# Altium PCB AICat V1.7 双面板 板厚1.6mm_lrd.PcbDoc (part 2 of 6)
Units mm, origin at the board's own origin, x right, y up, seen from the top; angles counter-clockwise.
Board outline 63.83 x 43.59 mm, 2 copper layers (Top Layer, Bottom Layer); 123 components, 84 nets, 332 pads, 255 vias.
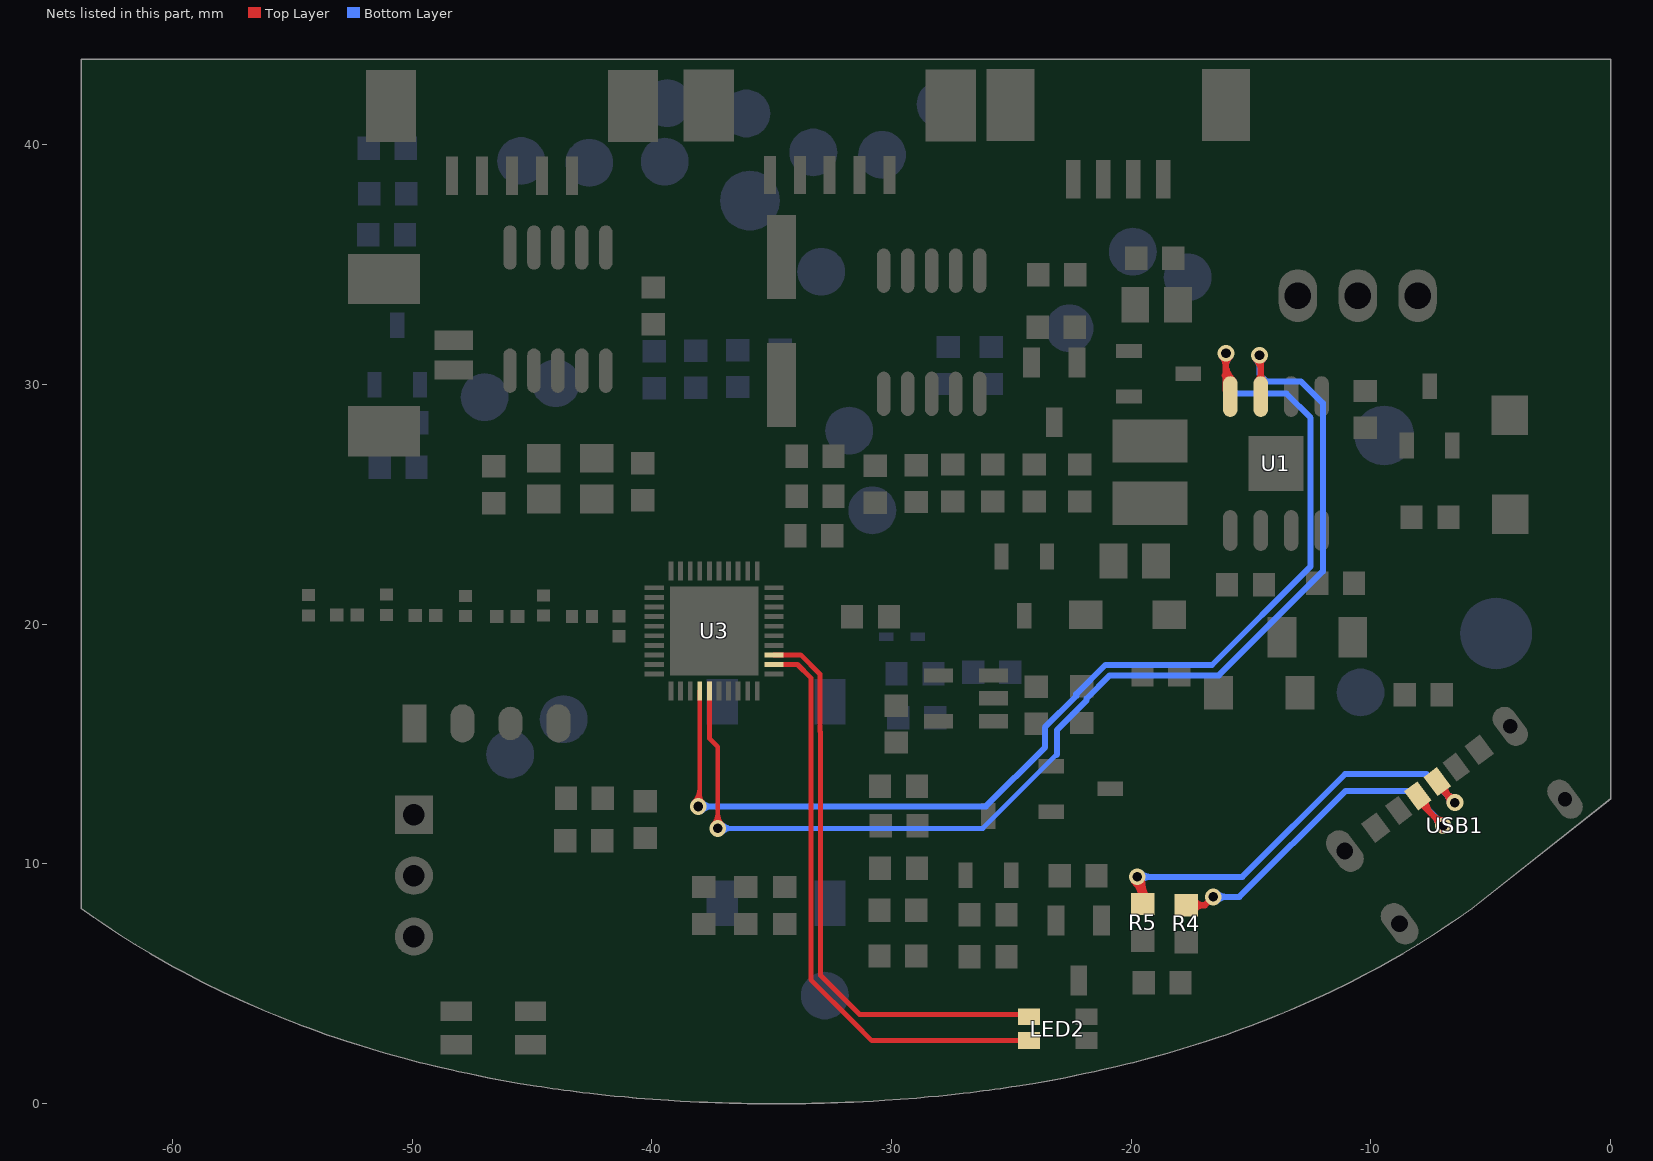
[diagram p2: the nets of this part, all layers, seen from the top]

## Via types
v1: diameter 0.7, hole 0.4, Top Layer to Bottom Layer, tented both sides, 255 vias

## Nets (pads, with @x,y where several pads share a name; then routed paths per layer and width w, separated by ;. In a path a pad name is that pad's centre, name@x,y a point inside that pad or via, vN(x,y) a via of type N, cw(c..) or ccw(c..) an arc to the next point about the centre after c; other vN are vias at no path point) (continued)
CC1: R4.1 USB1.A5 | length 36.8
  Top Layer w0.254: R4.1@-17.697,8.269 -16.927,8.269 ; v1(-16.579,8.616) -16.927,8.269 ; USB1.A5@-8.038,12.83 -8.038,12.648 v1(-6.978,11.588) ; R4.1@-17.417,8.046 cw(c-16.927,7.617) -16.927,8.269 ; R4.1@-17.417,8.046 cw(c-16.927,7.617) -16.927,8.269 ; R4.1@-17.417,8.046 cw(c-16.927,7.617) -16.927,8.269 ; R4.1@-17.417,8.046 cw(c-16.927,7.617) -16.927,8.269 ; R4.1@-17.417,8.046 cw(c-16.927,7.617) -16.927,8.269 ; R4.1@-17.417,8.491 ccw(c-16.927,8.92) -16.927,8.269 ; R4.1@-17.417,8.491 ccw(c-16.927,8.92) -16.927,8.269 ; R4.1@-17.417,8.491 ccw(c-16.927,8.92) -16.927,8.269 ; R4.1@-17.417,8.491 ccw(c-16.927,8.92) -16.927,8.269 ; R4.1@-17.417,8.491 ccw(c-16.927,8.92) -16.927,8.269 ; USB1.A5@-7.725,12.71 ccw(c-6.819,12.71) -7.46,12.07 ; USB1.A5@-7.725,12.71 ccw(c-6.819,12.71) -7.46,12.07 ; USB1.A5@-7.725,12.71 ccw(c-6.819,12.71) -7.46,12.07 ; USB1.A5@-7.725,12.71 ccw(c-6.819,12.71) -7.46,12.07 ; USB1.A5@-7.725,12.71 ccw(c-6.819,12.71) -7.46,12.07 ; -7.359,11.969 cw(c-7.739,11.588) v1@-7.201,11.588 ; -7.359,11.969 ccw(c-6.978,12.349) v1@-6.978,11.811 ; -7.359,11.969 cw(c-7.739,11.588) v1@-7.201,11.588 ; -7.359,11.969 ccw(c-6.978,12.349) v1@-6.978,11.811 ; -7.359,11.969 ccw(c-6.978,12.349) v1@-6.978,11.811 ; -7.359,11.969 cw(c-7.739,11.588) v1@-7.201,11.588 ; -7.359,11.969 ccw(c-6.978,12.349) v1@-6.978,11.811 ; -7.359,11.969 cw(c-7.739,11.588) v1@-7.201,11.588 ; -7.359,11.969 ccw(c-6.978,12.349) v1@-6.978,11.811 ; -7.359,11.969 cw(c-7.739,11.588) v1@-7.201,11.588
  Bottom Layer w0.254: v1(-16.579,8.616) -15.487,8.616 -11.067,13.036 -8.4,13.036 v1@-6.965,11.601 ; v1@-16.421,8.458 cw(c-16.041,8.078) -16.041,8.616 ; v1@-16.421,8.458 cw(c-16.041,8.078) -16.041,8.616 ; v1@-16.421,8.458 cw(c-16.041,8.078) -16.041,8.616 ; v1@-16.421,8.458 cw(c-16.041,8.078) -16.041,8.616 ; v1@-16.421,8.458 cw(c-16.041,8.078) -16.041,8.616 ; v1@-16.421,8.774 ccw(c-16.041,9.155) -16.041,8.616 ; v1@-16.421,8.774 ccw(c-16.041,9.155) -16.041,8.616 ; v1@-16.421,8.774 ccw(c-16.041,9.155) -16.041,8.616 ; v1@-16.421,8.774 ccw(c-16.041,9.155) -16.041,8.616 ; v1@-16.421,8.774 ccw(c-16.041,9.155) -16.041,8.616 ; -7.376,12.012 cw(c-7.801,11.588) v1@-7.201,11.588 ; -7.376,12.012 cw(c-7.801,11.588) v1@-7.201,11.588 ; -7.376,12.012 cw(c-7.801,11.588) v1@-7.201,11.588 ; -7.376,12.012 cw(c-7.801,11.588) v1@-7.201,11.588 ; -7.376,12.012 cw(c-7.801,11.588) v1@-7.201,11.588 ; -7.315,11.951 ccw(c-6.978,12.288) v1@-6.978,11.811 ; -7.315,11.951 ccw(c-6.978,12.288) v1@-6.978,11.811 ; -7.315,11.951 ccw(c-6.978,12.288) v1@-6.978,11.811 ; -7.315,11.951 ccw(c-6.978,12.288) v1@-6.978,11.811 ; -7.315,11.951 ccw(c-6.978,12.288) v1@-6.978,11.811
CC2: R5.1 USB1.B5 | length 49.2
  Top Layer w0.254: v1(-19.754,9.454) -19.525,9.226 R5.1@-19.525,8.319 ; USB1.B5@-7.239,13.432 -7.239,13.297 v1(-6.495,12.553) ; v1@-19.912,9.297 cw(c-20.844,8.364) R5.1@-19.525,8.364 ; v1@-19.912,9.297 cw(c-20.844,8.364) R5.1@-19.525,8.364 ; v1@-19.912,9.297 cw(c-20.844,8.364) R5.1@-19.525,8.364 ; v1@-19.912,9.297 cw(c-20.844,8.364) R5.1@-19.525,8.364 ; v1@-19.912,9.297 cw(c-20.844,8.364) R5.1@-19.525,8.364 ; R5.1@-19.764,8.558 ccw(c-20.341,9.135) -19.525,9.135 ; R5.1@-19.764,8.558 ccw(c-20.341,9.135) -19.525,9.135 ; R5.1@-19.764,8.558 ccw(c-20.341,9.135) -19.525,9.135 ; R5.1@-19.764,8.558 ccw(c-20.341,9.135) -19.525,9.135 ; R5.1@-19.764,8.558 ccw(c-20.341,9.135) -19.525,9.135 ; v1@-19.732,9.476 cw(c-20.231,8.977) -19.525,8.977 ; v1@-19.732,9.476 cw(c-20.231,8.977) -19.525,8.977 ; v1@-19.732,9.476 cw(c-20.231,8.977) -19.525,8.977 ; v1@-19.732,9.476 cw(c-20.231,8.977) -19.525,8.977 ; v1@-19.732,9.476 cw(c-20.231,8.977) -19.525,8.977 ; -19.525,9.135 ccw(c-18.709,9.135) R5.1@-19.286,8.558 ; -19.525,9.135 ccw(c-18.709,9.135) R5.1@-19.286,8.558 ; -19.525,9.135 ccw(c-18.709,9.135) R5.1@-19.286,8.558 ; -19.525,9.135 ccw(c-18.709,9.135) R5.1@-19.286,8.558 ; -19.525,9.135 ccw(c-18.709,9.135) R5.1@-19.286,8.558 ; USB1.B5@-7.149,13.089 cw(c-7.149,12.803) -6.947,13.005 ; USB1.B5@-7.149,13.089 cw(c-7.149,12.803) -6.947,13.005 ; USB1.B5@-7.149,13.089 cw(c-7.149,12.803) -6.947,13.005 ; USB1.B5@-7.149,13.089 cw(c-7.149,12.803) -6.947,13.005 ; USB1.B5@-7.149,13.089 cw(c-7.149,12.803) -6.947,13.005 ; USB1.B5@-6.926,13.312 ccw(c-6.135,13.312) v1@-6.694,12.752 ; USB1.B5@-6.926,13.312 ccw(c-6.135,13.312) v1@-6.694,12.752 ; USB1.B5@-6.926,13.312 ccw(c-6.135,13.312) v1@-6.694,12.752 ; USB1.B5@-6.926,13.312 ccw(c-6.135,13.312) v1@-6.694,12.752 ; USB1.B5@-6.926,13.312 ccw(c-6.135,13.312) v1@-6.694,12.752 ; -6.876,12.934 cw(c-7.257,12.553) v1@-6.718,12.553 ; -6.876,12.934 ccw(c-6.495,13.315) v1@-6.495,12.776 ; -6.876,12.934 cw(c-7.257,12.553) v1@-6.718,12.553 ; -6.876,12.934 ccw(c-6.495,13.315) v1@-6.495,12.776 ; -6.876,12.934 ccw(c-6.495,13.315) v1@-6.495,12.776 ; -6.876,12.934 cw(c-7.257,12.553) v1@-6.718,12.553 ; -6.876,12.934 ccw(c-6.495,13.315) v1@-6.495,12.776 ; -6.876,12.934 cw(c-7.257,12.553) v1@-6.718,12.553 ; -6.876,12.934 ccw(c-6.495,13.315) v1@-6.495,12.776 ; -6.876,12.934 cw(c-7.257,12.553) v1@-6.718,12.553
  Bottom Layer w0.254: v1(-19.754,9.454) -15.367,9.454 -11.074,13.747 -7.689,13.747 v1(-6.495,12.553) ; v1@-19.596,9.297 cw(c-19.216,8.916) -19.216,9.454 ; v1@-19.596,9.297 cw(c-19.216,8.916) -19.216,9.454 ; v1@-19.596,9.297 cw(c-19.216,8.916) -19.216,9.454 ; v1@-19.596,9.297 cw(c-19.216,8.916) -19.216,9.454 ; v1@-19.596,9.297 cw(c-19.216,8.916) -19.216,9.454 ; v1@-19.596,9.612 ccw(c-19.216,9.993) -19.216,9.454 ; v1@-19.596,9.612 ccw(c-19.216,9.993) -19.216,9.454 ; v1@-19.596,9.612 ccw(c-19.216,9.993) -19.216,9.454 ; v1@-19.596,9.612 ccw(c-19.216,9.993) -19.216,9.454 ; v1@-19.596,9.612 ccw(c-19.216,9.993) -19.216,9.454 ; -6.876,12.934 cw(c-7.257,12.553) v1@-6.718,12.553 ; -6.876,12.934 ccw(c-6.495,13.315) v1@-6.495,12.776 ; -6.876,12.934 cw(c-7.257,12.553) v1@-6.718,12.553 ; -6.876,12.934 ccw(c-6.495,13.315) v1@-6.495,12.776 ; -6.876,12.934 ccw(c-6.495,13.315) v1@-6.495,12.776 ; -6.876,12.934 cw(c-7.257,12.553) v1@-6.718,12.553 ; -6.876,12.934 ccw(c-6.495,13.315) v1@-6.495,12.776 ; -6.876,12.934 cw(c-7.257,12.553) v1@-6.718,12.553 ; -6.876,12.934 ccw(c-6.495,13.315) v1@-6.495,12.776 ; -6.876,12.934 cw(c-7.257,12.553) v1@-6.718,12.553
CHAR_G: LED2.3 U3.12 | length 24.8
  Top Layer w0.203: U3.12@-34.904,18.314 -33.927,18.314 -33.368,17.755 -33.368,5.162 -31.565,3.358 ; -31.379,3.173 -31.565,3.358 ; LED2.3@-24.268,2.622 -30.828,2.622 -31.565,3.358
CHARG_EN: U1.8 U3.4 | length 73
  Top Layer w0.203: v1(-38.067,12.391) -38.003,12.456 -38.003,14.407 ; -38.003,13.456 -38.003,14.407 ; U3.4@-38.003,17.214 -38.003,14.407 ; v1@-38.243,12.567 ccw(c-38.822,13.146) -38.003,13.146 ; v1@-38.243,12.567 ccw(c-38.822,13.146) -38.003,13.146 ; v1@-38.243,12.567 ccw(c-38.822,13.146) -38.003,13.146 ; v1@-38.243,12.567 ccw(c-38.822,13.146) -38.003,13.146 ; -38.003,12.836 ccw(c-37.623,12.836) v1@-37.892,12.567 ; -38.003,12.836 ccw(c-37.623,12.836) v1@-37.892,12.567 ; -38.003,12.836 ccw(c-37.623,12.836) v1@-37.892,12.567 ; -38.003,12.836 ccw(c-37.623,12.836) v1@-37.892,12.567
  Top Layer w0.254: U1.8@-16.071,29.749 v1@-16.071,31.171 ; -16.071,30.333 -15.868,30.13 U1.8@-15.868,30.079 ; v1@-16.203,31.141 cw(c-16.523,30.821) -16.071,30.821 ; v1@-16.203,31.141 cw(c-16.523,30.821) -16.071,30.821 ; v1@-16.203,31.141 cw(c-16.523,30.821) -16.071,30.821 ; v1@-16.203,31.141 cw(c-16.523,30.821) -16.071,30.821 ; v1@-16.203,31.141 cw(c-16.523,30.821) -16.071,30.821 ; -16.116,30.378 cw(c-16.327,30.167) U1.8@-16.039,30.087 ; -16.116,30.378 cw(c-16.327,30.167) U1.8@-16.039,30.087 ; -16.116,30.378 cw(c-16.327,30.167) U1.8@-16.039,30.087 ; -16.116,30.378 cw(c-16.327,30.167) U1.8@-16.039,30.087 ; -16.116,30.378 cw(c-16.327,30.167) U1.8@-16.039,30.087 ; -16.071,30.347 ccw(c-15.561,30.347) U1.8@-15.922,29.986 ; -16.071,30.347 ccw(c-15.561,30.347) U1.8@-15.922,29.986 ; -16.071,30.347 ccw(c-15.561,30.347) U1.8@-15.922,29.986 ; -16.071,30.347 ccw(c-15.561,30.347) U1.8@-15.922,29.986 ; -16.071,30.347 ccw(c-15.561,30.347) U1.8@-15.922,29.986 ; -16.071,30.699 cw(c-15.446,30.699) v1@-15.888,31.141 ; -16.071,30.699 cw(c-15.446,30.699) v1@-15.888,31.141 ; -16.071,30.699 cw(c-15.446,30.699) v1@-15.888,31.141 ; -16.071,30.699 cw(c-15.446,30.699) v1@-15.888,31.141 ; -16.071,30.699 cw(c-15.446,30.699) v1@-15.888,31.141 ; v1@-16.071,30.96 ccw(c-14.948,30.96) U1.8@-15.742,30.166 ; v1@-16.071,30.96 ccw(c-14.948,30.96) U1.8@-15.742,30.166 ; v1@-16.071,30.96 ccw(c-14.948,30.96) U1.8@-15.742,30.166 ; v1@-16.071,30.96 ccw(c-14.948,30.96) U1.8@-15.742,30.166 ; v1@-16.071,30.96 ccw(c-14.948,30.96) U1.8@-15.742,30.166
  Bottom Layer w0.254: v1(-38.067,12.391) -26.063,12.391 -23.605,14.849 -23.605,15.69 -22.294,17 -22.294,17.076 -21.077,18.294 -16.63,18.294 -12.515,22.408 -12.515,28.606 -13.531,29.622 -15.588,29.622 -16.046,30.079 v1(-16.046,31.298) ; v1@-37.91,12.234 cw(c-37.529,11.853) -37.529,12.391 ; v1@-37.91,12.234 cw(c-37.529,11.853) -37.529,12.391 ; v1@-37.91,12.234 cw(c-37.529,11.853) -37.529,12.391 ; v1@-37.91,12.234 cw(c-37.529,11.853) -37.529,12.391 ; v1@-37.91,12.549 ccw(c-37.529,12.93) -37.529,12.391 ; v1@-37.91,12.549 ccw(c-37.529,12.93) -37.529,12.391 ; v1@-37.91,12.549 ccw(c-37.529,12.93) -37.529,12.391 ; v1@-37.91,12.549 ccw(c-37.529,12.93) -37.529,12.391 ; v1@-16.203,31.141 cw(c-16.584,30.76) -16.046,30.76 ; v1@-16.203,31.141 cw(c-16.584,30.76) -16.046,30.76 ; v1@-16.203,31.141 cw(c-16.584,30.76) -16.046,30.76 ; v1@-16.203,31.141 cw(c-16.584,30.76) -16.046,30.76 ; v1@-16.203,31.141 cw(c-16.584,30.76) -16.046,30.76 ; -16.046,30.76 cw(c-15.507,30.76) v1@-15.888,31.141 ; -16.046,30.76 cw(c-15.507,30.76) v1@-15.888,31.141 ; -16.046,30.76 cw(c-15.507,30.76) v1@-15.888,31.141 ; -16.046,30.76 cw(c-15.507,30.76) v1@-15.888,31.141 ; -16.046,30.76 cw(c-15.507,30.76) v1@-15.888,31.141
CHRG_R: LED2.1 U3.13 | length 24.2
  Top Layer w0.203: U3.13@-34.904,18.714 -33.789,18.714 -32.987,17.913 -32.987,15.525 ; -32.962,15.5 -32.962,5.34 -31.334,3.712 -24.358,3.712 LED2.1@-24.268,3.622
CHRG_STATE: U1.7 U3.5 | length 68.1
  Top Layer w0.203: U3.5@-37.603,17.214 -37.603,15.233 -37.255,14.885 v1(-37.255,11.477) ; v1@-37.43,11.653 ccw(c-37.854,12.077) -37.255,12.077 ; v1@-37.43,11.653 ccw(c-37.854,12.077) -37.255,12.077 ; v1@-37.43,11.653 ccw(c-37.854,12.077) -37.255,12.077 ; v1@-37.43,11.653 ccw(c-37.854,12.077) -37.255,12.077 ; -37.255,12.077 ccw(c-36.655,12.077) v1@-37.079,11.653 ; -37.255,12.077 ccw(c-36.655,12.077) v1@-37.079,11.653 ; -37.255,12.077 ccw(c-36.655,12.077) v1@-37.079,11.653 ; -37.255,12.077 ccw(c-36.655,12.077) v1@-37.079,11.653
  Top Layer w0.254: U1.7@-14.598,29.495 -14.598,30.968 v1@-14.572,30.994 ; v1@-14.806,31.064 cw(c-15.31,30.561) -14.598,30.561 ; v1@-14.806,31.064 cw(c-15.31,30.561) -14.598,30.561 ; v1@-14.806,31.064 cw(c-15.31,30.561) -14.598,30.561 ; v1@-14.806,31.064 cw(c-15.31,30.561) -14.598,30.561 ; v1@-14.806,31.064 cw(c-15.31,30.561) -14.598,30.561 ; U1.7@-14.724,30.166 ccw(c-15.027,30.469) -14.598,30.469 ; U1.7@-14.724,30.166 ccw(c-15.027,30.469) -14.598,30.469 ; U1.7@-14.724,30.166 ccw(c-15.027,30.469) -14.598,30.469 ; U1.7@-14.724,30.166 ccw(c-15.027,30.469) -14.598,30.469 ; U1.7@-14.724,30.166 ccw(c-15.027,30.469) -14.598,30.469 ; -14.598,30.469 ccw(c-14.169,30.469) U1.7@-14.472,30.166 ; -14.598,30.469 ccw(c-14.169,30.469) U1.7@-14.472,30.166 ; -14.598,30.469 ccw(c-14.169,30.469) U1.7@-14.472,30.166 ; -14.598,30.469 ccw(c-14.169,30.469) U1.7@-14.472,30.166 ; -14.598,30.469 ccw(c-14.169,30.469) U1.7@-14.472,30.166 ; -14.598,30.806 cw(c-14.233,30.806) v1@-14.491,31.064 ; -14.598,30.806 cw(c-14.233,30.806) v1@-14.491,31.064 ; -14.598,30.806 cw(c-14.233,30.806) v1@-14.491,31.064 ; -14.598,30.806 cw(c-14.233,30.806) v1@-14.491,31.064 ; -14.598,30.806 cw(c-14.233,30.806) v1@-14.491,31.064
  Bottom Layer w0.203: v1(-37.255,11.477) -26.19,11.477 -23.122,14.545 ; v1@-37.079,11.301 cw(c-36.655,10.877) -36.655,11.477 ; v1@-37.079,11.301 cw(c-36.655,10.877) -36.655,11.477 ; v1@-37.079,11.301 cw(c-36.655,10.877) -36.655,11.477 ; v1@-37.079,11.301 cw(c-36.655,10.877) -36.655,11.477 ; v1@-37.079,11.653 ccw(c-36.655,12.077) -36.655,11.477 ; v1@-37.079,11.653 ccw(c-36.655,12.077) -36.655,11.477 ; v1@-37.079,11.653 ccw(c-36.655,12.077) -36.655,11.477 ; v1@-37.079,11.653 ccw(c-36.655,12.077) -36.655,11.477
  Bottom Layer w0.254: -23.122,14.545 -23.097,14.57 -23.097,15.587 -21.862,16.821 -21.862,16.898 -20.898,17.862 -16.343,17.862 -12.007,22.198 -12.007,29.216 -12.921,30.13 -14.369,30.13 -14.649,30.409 v1(-14.649,31.222) ; v1@-14.806,31.064 cw(c-15.187,30.684) -14.649,30.684 ; v1@-14.806,31.064 cw(c-15.187,30.684) -14.649,30.684 ; v1@-14.806,31.064 cw(c-15.187,30.684) -14.649,30.684 ; v1@-14.806,31.064 cw(c-15.187,30.684) -14.649,30.684 ; v1@-14.806,31.064 cw(c-15.187,30.684) -14.649,30.684 ; -14.649,30.684 cw(c-14.11,30.684) v1@-14.491,31.064 ; -14.649,30.684 cw(c-14.11,30.684) v1@-14.491,31.064 ; -14.649,30.684 cw(c-14.11,30.684) v1@-14.491,31.064 ; -14.649,30.684 cw(c-14.11,30.684) v1@-14.491,31.064 ; -14.649,30.684 cw(c-14.11,30.684) v1@-14.491,31.064